# Altium PCB v3.1.PcbDoc
Units mm, origin at the board's own origin, x right, y up, seen from the top; angles counter-clockwise.
Board outline 166.23 x 128 mm, 2 copper layers (Top Layer, Bottom Layer); 84 components, 185 nets, 334 pads, 82 vias.
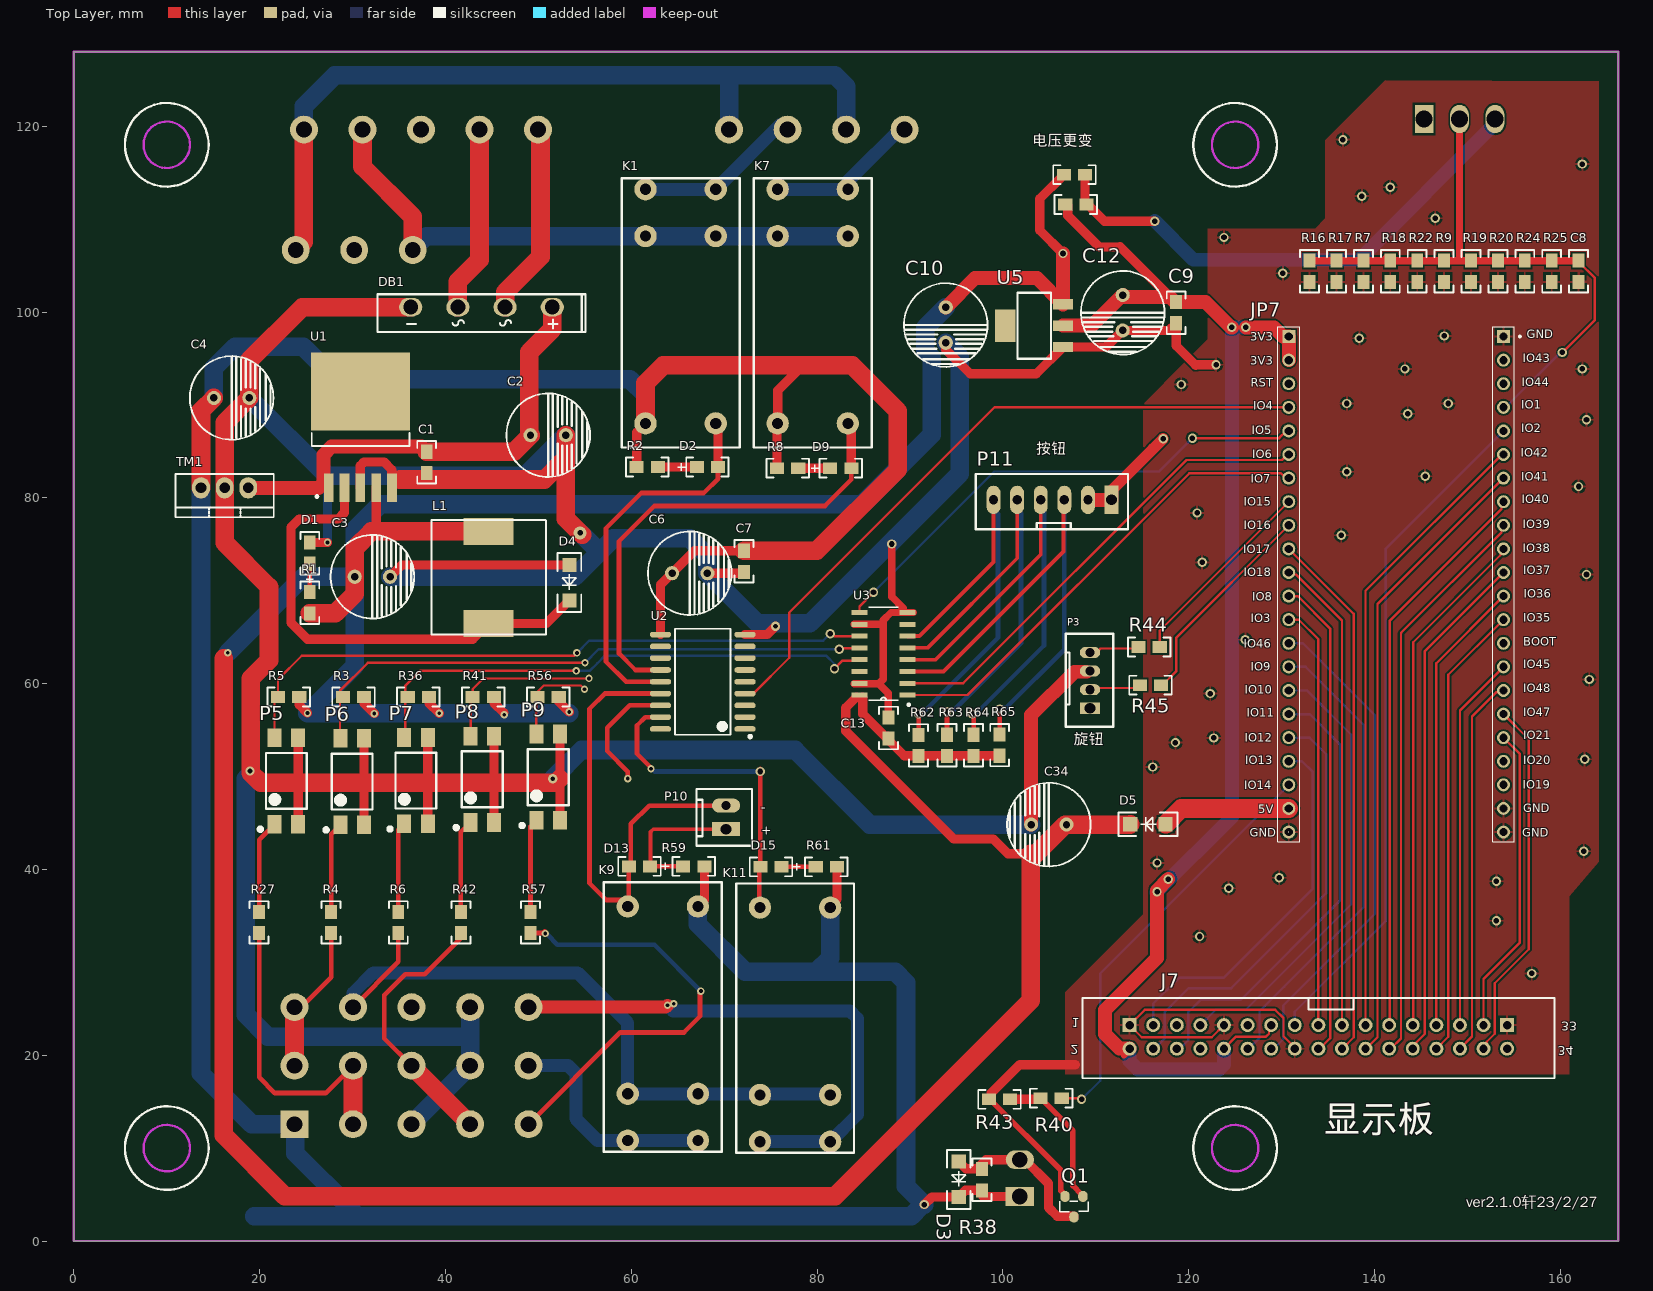
[diagram p0: Top Layer view]
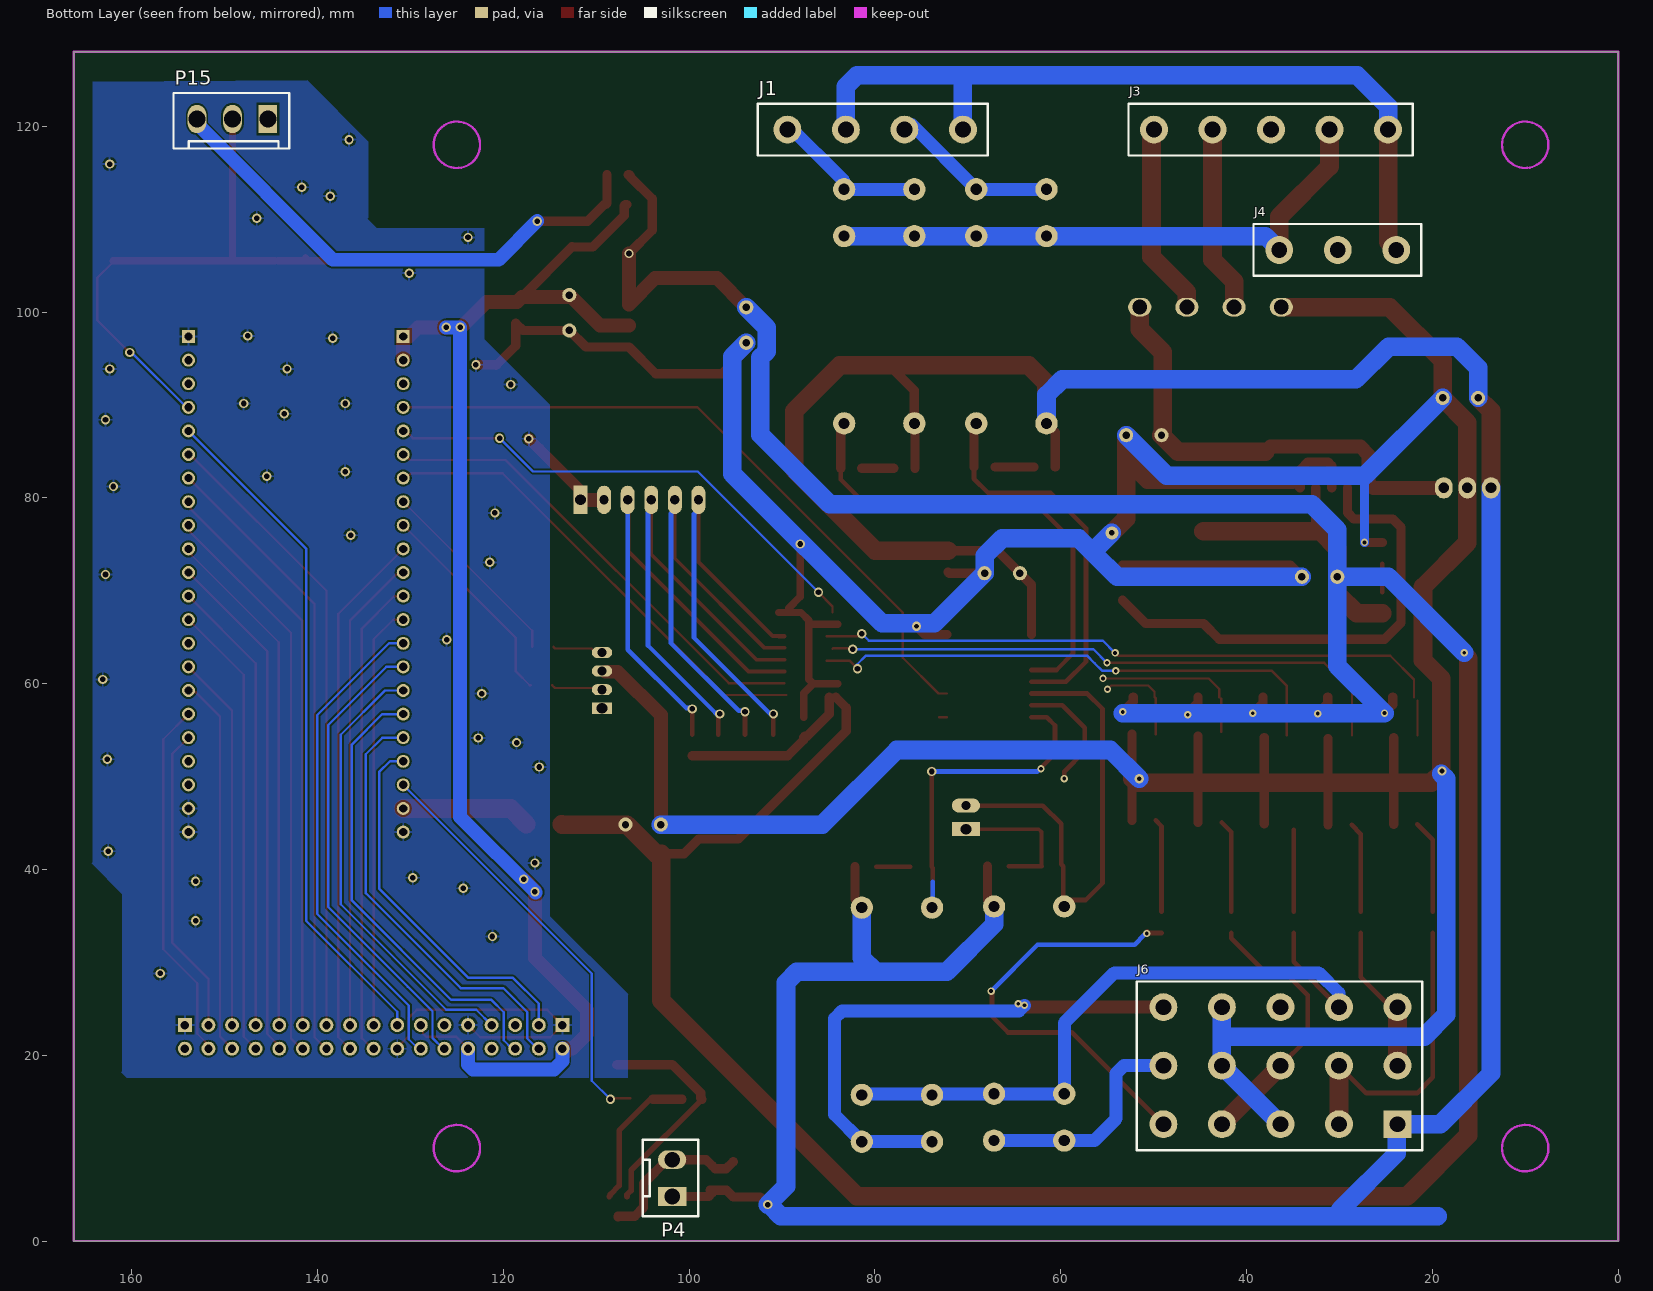
[diagram p1: Bottom Layer view, seen from below]

## Layer stack, top to bottom
Top Solder: solder mask 0.0102, Solder Resist, Dk 3.5
Top Layer: signal copper 0.0356
Dielectric1: dielectric 0.32, FR-4, Dk 4.8
Bottom Layer: signal copper 0.0356
Bottom Solder: solder mask 0.0102, Solder Resist, Dk 3.5

## Board outline
0,0 0,128 166.225,128 166.225,0

## Design rules (kind name [scope] priority, off if disabled: settings)
Clearance [All] p1: gap=0.2 ignorepadtopadclearanceinfootprint=FALSE except(0: Arc-Hole Track-Hole SMDPad-Hole THPad-Hole Via-Hole Fill-Hole Poly-Hole Region-Hole Text-Hole)
ComponentClearance [All] p1 off: gap=0.254 collisioncheckmode=3 verticalgap=0.254 showdistances=FALSE
PlaneConnect [All] p1: planeconnectstyle=Direct reliefexpansion=0.508 reliefentries=4 reliefconductorwidth=0.254 reliefairgap=0.254
PolygonConnect [All] p1: connectstyle=Relief reliefconductorwidth=0.254 reliefentries=4 polygonreliefangle="90 Angle" airgapwidth=0.254
RoutingVias [All] p1: holewidth=0.711 width=1.27 viastyle="Through Hole" minholewidth=0.711 minwidth=1.27 maxholewidth=0.711 maxwidth=1.27
SilkToSolderMaskClearance SilkscreenOverComponentPads [IsPad] p1: minsilkscreentomaskgap=0.254 clearancetoexposedcopper=TRUE
SolderMaskExpansion [All] p1: expansion=0.102 istentingtop=FALSE
Width [All] p1: maxlimit=5 minlimit=0.254 preferedwidth=0.3 minimp=50.000000 maximp=50.000000 favimp=50.000000
27 further rules are at their usual default settings.

## Classes and differential pairs
component class Drive: C1 C2 C3 C4 C6 C7 C8 C9 C10 C12 C34 D1 D2 D3 D4 D9 D13 D15 DB1 J1 J3 J4 J6 K1 K7 K9 K11 L1 P4 P5 P6 P7 P8 P9 P15 Q1 R1 R2 R3 R4 R5 R6 R7 R8 R9 R16 R17 R18 R19 R20 R22 R24 R25 R27 R36 R38 R40 R41 R42 R43 R56 R57 R59 R61 TM1 U1 U2 U5

## Components (designator, comment, footprint, x,y, rotation, side; value= is the part's Value field where it differs from the comment)
C1 "104" 0805 37.973,82.677 r90 top
C2 "470UF/50V" CD9 50.8,86.741 r90 top value=470uF
C3 "220uF/50V" CD9 31.877,71.501 r90 top value=470uF
C4 "470UF/50V" CD9 16.725,90.75 r90 top value=470uF
C6 "220uF/50V" CD9 66.04,71.882 r90 top value=470uF
C7 "104" 0805 72.136,72.009 r90 top
C8 "103" 0805 161.971,103.244 r90 top
C9 "104" 0805 118.65,101.075 r270 top
C10 "470UF/50V" CD9 93.85,98.85 r0 top
C12 "470UF/50V" CD9 112.9,100.175 r0 top locked
C13 "104" 0805 87.675,56.361 r270 top (schematic designator C9)
C34 "470UF/50V" CD9 105.199,44.825 r270 top value=470uF
D1 "04" LED-T 25.527,74.041 r90 top
D2 "04" LED-T 68.199,83.185 r0 top
D3 "IN4148" DO-214AC 94.875,5.625 r180 top
D4 "IN5819" DO-214AC 52.959,69.85 r180 top
D5 "IN5819" DO-214AC 114.598,45.25 r90 top (schematic designator D4)
D9 "04" LED-T 82.55,83.058 r0 top
D13 "04" LED-T 60.885,40.455 r180 top
D15 "04" LED-T 75.037,40.405 r180 top
DB1 "DB157S" LC-GBU 43.875,100.525 r0 top
J1 "CON4" 4PIN-6.3 70.525,119.634 r0 bottom
J3 "变压器入" 5PIN-6.3 24.765,119.634 r0 bottom
J4 "220V供电" 3PIN-6.3 23.876,106.68 r0 bottom
J6 "3*15JR" 3*5PIN-6.3 23.749,12.573 r0 bottom
J7 "header34" "PCBComponent_1 - duplicate" 161.29,134.65 r180 top locked
JP7 "Comment" TE_5-22 111.135,82.44 r0 top locked
K1 "HF115F/024-1HS3" HF115FA 69.088,88.011 r90 top
K7 "HF115F/024-1HS3" HF115FA 83.312,88.011 r90 top
K9 "HF115F/024-1HS3" HF115FA 59.615,36.01 r270 top locked
K11 "HF115F/024-1HS3" HF115FA 73.85,35.885 r270 top
L1 "330uH" SMD331 38.481,65.278 r0 top
P3 "Header4" "4PIN 2.0" 104.025,55.35 r90 top
P4 "Header 2" "2PIN 3.96" 101.825,8.75 r90 bottom
P5 "PC817" LC-SMD-4 22.875,49.525 r90 top
P6 "PC817" LC-SMD-4 29.95,49.45 r90 top
P7 "PC817" LC-SMD-4 36.825,49.55 r90 top
P8 "PC817" LC-SMD-4 43.95,49.7 r90 top
P9 "PC817" LC-SMD-4 51.05,49.925 r90 top
P10 "Header 2" "2PIN 2.54" 70.2,45.6 r90 top (schematic designator P2)
P11 "Header 6" PCBComponent_1 152.335,79.175 r180 top
P15 "Header 3" "3PIN 3.96" 149.155,120.775 r0 bottom
Q1 "8050" "SOT-23 - duplicate" 107.7,3.625 r180 top
R1 "2K" 0805 25.4,69.85 r270 top
R2 "10k" 0805 62.865,83.312 r180 top value=10K
R3 "10k" 0805 28.956,58.547 r0 top value=10K
R4 "4.7K" 0805 27.686,33.147 r90 top
R5 "10k" 0805 21.971,58.547 r0 top value=10K
R6 "4.7K" 0805 34.925,33.147 r90 top
R7 "47K" 0805 138.806,103.244 r90 top
R8 "10k" 0805 77.978,83.185 r180 top value=10K
R9 "47K" 0805 147.493,103.244 r90 top
R16 "47K" 0805 133.015,103.244 r90 top
R17 "47K" 0805 135.911,103.244 r90 top
R18 "47K" 0805 141.702,103.244 r90 top
R19 "47K" 0805 150.389,103.244 r90 top
R20 "47K" 0805 153.284,103.244 r90 top
R22 "47K" 0805 144.597,103.244 r90 top
R24 "47K" 0805 156.18,103.244 r90 top
R25 "47K" 0805 159.075,103.244 r90 top
R27 "4.7K" 0805 19.939,33.147 r90 top
R36 "10k" 0805 35.941,58.547 r0 top value=10K
R38 "10K" 0805 97.75,7.736 r270 top value="RT0603BRD071KL YAGEO"
R40 "470" 0805 106.336,15.375 r180 top value="RT0603BRD071KL YAGEO"
R41 "10k" 0805 42.926,58.547 r0 top value=10K
R42 "4.7K" 0805 41.656,33.147 r90 top
R43 "10K" 0805 98.489,15.25 r0 top value="RT0603BRD071KL YAGEO"
R44 "10K" 0805 116.886,63.95 r180 top value="RT0603BRD071KL YAGEO" (schematic designator R43)
R45 "10K" 0805 117.036,59.825 r180 top value="RT0603BRD071KL YAGEO" (schematic designator R43)
R56 "10k" 0805 49.911,58.547 r0 top value=10K
R57 "4.7K" 0805 49.149,33.147 r90 top
R59 "10k" 0805 65.584,40.328 r0 top value=10K
R60 "0k" 0805 109,111.575 r180 top value=10K
R60 "0k" 0805 108.85,114.775 r180 top value=10K
R61 "10k" 0805 79.863,40.278 r0 top value=10K
R62 "10k" 0805 90.925,52.2 r90 top value=10K (schematic designator R60)
R63 "10k" 0805 93.988,52.214 r90 top value=10K (schematic designator R60)
R64 "10k" 0805 96.85,52.214 r90 top value=10K (schematic designator R60)
R65 "10k" 0805 99.65,52.242 r90 top value=10K (schematic designator R60)
TM1 "LM7824CT" TO-220 16.225,81.075 r180 top
U1 "LM2575-5" D2PAK 37.211,89.535 r90 top
U2 "ULN2803" SOP-18_300mil 67.691,60.198 r90 top
U3 "SN74HC165D" 74HC165 87.15,62.575 r180 top
U5 "AMS1117-3.3_C166063" SOT-223_L6.7-W3.5-P2.30-BR 103.375,98.525 r0 top

## Footprints (in the part's own frame and the unit in brackets; to place one, negate y for a bottom-side part, rotate by r counter-clockwise, add the part's x,y. Pads: shape width x height; smd on the part's side, far side on the other; paste and mask are expansions set on the pad)
"2PIN 2.54" [mm]
  rect 1.5x3.048 hole 1.143: 1(-1.27,0)
  oval 1.5x3.048 hole 1: 2(1.27,0)
  silkscreen extent -3.05,-2.79 3.05,3.18
"2PIN 3.96" [mm]
  rect 2x3.048 hole 1.7: 1(-3.96,0)
  oval 2x3.048 hole 1.7: 2(0,0)
  silkscreen extent -6.1,-2.79 2.16,3.18
3*5PIN-6.3 [mm]
  rect 3x3 hole 1.7: 1(0,0)
  round 3 hole 1.7: 2(6.3,0) 3(12.6,0) 4(18.9,0) 5(25.2,0) 6(0,-6.3) 7(6.3,-6.3) 8(12.6,-6.3) 9(18.9,-6.3) 10(25.2,-6.3) 11(0,-12.6) 12(6.3,-12.6) 13(12.6,-12.6) 14(18.9,-12.6) 15(25.2,-12.6)
  silkscreen extent -2.67,-15.37 28.07,2.79
"3PIN 3.96" [mm]
  rect 2x3.048 hole 1.8: 1(-3.82,0)
  oval 2x3.048 hole 1.8: 2(0,0) 3(3.82,0)
  silkscreen extent -6.1,-2.79 6.35,3.17
3PIN-6.3 [mm]
  round 3 hole 1.7: 1(0,0) 2(6.3,0) 3(12.6,0)
  silkscreen extent -2.67,-2.79 15.37,2.79
"4PIN 2.0" [mm]
  rect 1.2x2.2 hole 1.143: 1(2,-5.35)
  oval 1.2x2.2 hole 1: 2(4,-5.35) 3(6,-5.35) 4(8,-5.35)
  silkscreen extent 0,-7.85 10,-2.75
4PIN-6.3 [mm]
  round 3 hole 1.7: 1(0,0) 2(6.3,0) 3(12.6,0) 4(18.9,0)
  silkscreen extent -2.67,-2.79 22.1,2.79
5PIN-6.3 [mm]
  round 3 hole 1.7: 1(0,0) 2(6.3,0) 3(12.6,0) 4(18.9,0) 5(25.2,0)
  silkscreen extent -2.67,-2.79 27.94,2.79
74HC165 [mil]
  rect 67x21 smd: CLK(-102,100) CLKINH(102,100) D0(102,-100) D1(102,-50) D2(102,0) D3(102,50) D4(-102,50) D5(-102,0) D6(-102,-50) D7(-102,-100) GND(-102.05,-199.95) LD(-102,150) QH(101.95,-199.95) "QH\""(-102,-150) SER(102,-150) VCC(102,150)
  silkscreen extent -111,-222 63,195
0805 [mil]
  rect 60x50 smd: 1(0,0) 2(90,0)
  silkscreen extent -45,-40 135,40
CD9 [mil]
  round 60 hole 31.5: 1(0,65) 2(0,-85)
  silkscreen extent -177,-187 177,167, body extent -181,-191 181,171, height 50
D2PAK [mm] "LM-2575"
  rect 3.05x1.05 smd: 1(-8.451,9.779) 2(-8.451,8.077) 3(-8.451,6.375) 4(-8.451,4.673) 5(-8.451,2.971)
  rect 8.4x10.65 smd: ""(1.899,6.35)
  silkscreen extent -9.52,1.1 -2.57,11.6, body extent -8.7,1.47 5.7,11.47, height 4.21
DO-214AC [mil]
  rect 60x60 smd: 1(-15,-115) 2(-15,35)
  silkscreen extent -65,-165 35,85
HF115FA [mm]
  round 2.4 hole 1.2: 1(20.16,7.56) 2(25.2,7.56) 3(20.16,0) 4(25.2,0) 5(0,7.56) 6(0,0)
  silkscreen extent -2.6,-2.57 26.4,10.13
LC-GBU [mm]
  oval 2.5x2 hole 1.6: 1(-2.54,0) 2(2.54,0) 3(7.62,0) 4(-7.62,0)
  silkscreen extent -11.2,-2.67 11.2,1.4
LC-SMD-4 [mm]
  rect 2x1.5 smd: 1(-4.65,1.27) 2(-4.65,-1.27) 3(4.65,-1.27) 4(4.65,1.27)
  silkscreen extent -5.4,-2.2 3,3, body extent -5.02,-2.42 5.01,2.42, height 3.9
LED-T [mil]
  rect 60x50 smd: 1(-45,5) 2(45,5)
  silkscreen extent -125,-35 90,45, body extent -34,-20 44,30, height 28
PCBComponent_1 [mm]
  rect 1.5x3.048 hole 1.143: 1(40.64,-0.6)
  oval 1.5x3.048 hole 1: 2(43.18,-0.6) 3(45.72,-0.6) 4(48.26,-0.6) 5(50.8,-0.6) 6(53.34,-0.6)
  silkscreen extent 38.86,-3.39 55.24,2.57
"PCBComponent_1 - duplicate" [mm]
  round 1.5 hole 0.9: 3V3(37.49,113.95) 3V3(47.65,113.95) CS(29.87,113.95) D0(9.55,113.95) D1(9.55,111.41) D2(12.09,113.95) D3(12.09,111.41) D4(14.63,113.95) D5(14.63,111.41) D6(17.17,113.95) D7(17.17,111.41) D8(19.71,113.95) D9(19.71,111.41) D10(22.25,113.95) D11(22.25,111.41) D12(24.79,113.95) D13(24.79,111.41) D14(27.33,113.95) D15(27.33,111.41) INT(40.03,111.41) NC(7.01,113.95) NC(34.95,111.41) NC(40.03,113.95) PS(37.49,111.41) RD(32.41,111.41) RS(29.87,111.41) RST(34.95,113.95) SCL(45.11,111.41) SDA(45.11,113.95) T_IN(42.57,111.41) WAT(42.57,113.95) WR(32.41,113.95)
  rect 1.5x1.5 hole 0.9: GND(7.01,111.41) GND(47.65,111.41)
  silkscreen extent 1.93,108.49 52.73,117.13
SMD331 [mm]
  rect 5.4x2.9 smd: 1(6.15,1.2) 2(6.15,11.1)
  silkscreen extent 0,0 12.32,12.32
SOP-18_300mil [mm]
  oval 0.6x2.3 smd: 1(-5.08,-4.55) 2(-3.81,-4.55) 3(-2.54,-4.55) 4(-1.27,-4.55) 5(0,-4.55) 6(1.27,-4.55) 7(2.54,-4.55) 8(3.81,-4.55) 9(5.08,-4.55) 10(5.08,4.55) 11(3.81,4.55) 12(2.54,4.55) 13(1.27,4.55) 14(0,4.55) 15(-1.27,4.55) 16(-2.54,4.55) 17(-3.81,4.55) 18(-5.08,4.55)
  silkscreen extent -6.05,-5.25 5.7,3
"SOT-23 - duplicate" [mil]
  oval 40x47.24 smd: B(-35.98,-45.98) C(2.01,40.98) E(40,-45.98)
  silkscreen extent -59,-26 62,18
SOT-223_L6.7-W3.5-P2.30-BR [mm]
  rect 2.2x1.1 smd: 1(3.099,-2.3) 2(3.099,0) 3(3.099,2.3)
  rect 2.2x3.5 smd: 4(-3.099,0)
  silkscreen extent -1.8,-3.55 1.8,3.55
TE_5-22 [mm]
  rect 1.398x1.398 hole 0.89: 1(19.64,14.92) 1(42.75,14.92)
  round 1.398 hole 0.89: 2(19.64,12.38) 2(42.75,12.38) 3(19.64,9.84) 3(42.75,9.84) 4(19.64,7.3) 4(42.75,7.3) 5(19.64,4.76) 5(42.75,4.76) 6(19.64,2.22) 6(42.75,2.22) 7(19.64,-0.32) 7(42.75,-0.32) 8(19.64,-2.86) 8(42.75,-2.86) 9(19.64,-5.4) 9(42.75,-5.4) 10(19.64,-7.94) 10(42.75,-7.94) 11(19.64,-10.48) 11(42.75,-10.48) 12(19.64,-13.02) 12(42.75,-13.02) 13(19.64,-15.56) 13(42.75,-15.56) 14(19.64,-18.1) 14(42.75,-18.1) 15(19.64,-20.64) 15(42.75,-20.64) 16(19.64,-23.18) 16(42.75,-23.18) 17(19.64,-25.72) 17(42.75,-25.72) 18(19.64,-28.26) 18(42.75,-28.26) 19(19.64,-30.8) 19(42.75,-30.8) 20(19.64,-33.34) 20(42.75,-33.34) 21(19.64,-35.88) 21(42.75,-35.88) 22(19.64,-38.42) 22(42.75,-38.42)
  silkscreen extent 18.47,-39.49 44.62,15.99
TO-220 [mil]
  oval 75x90 hole 45: 1(-100,0) 2(0,0) 3(100,0)
  silkscreen extent -208,-58 208,125

## Part data
C1 C7 C8: library part Cap, "Capacitor", LatestRevisionDate=17-Jul-2002, LatestRevisionNote="Re-released for DXP Platform.", PackageReference=RAD-0.3, Published=8-Jun-2000, Publisher="Altium Limited"
C2 C3 C4 C6 C34: library part "Cap Pol1", "Polarized Capacitor (Radial)", LatestRevisionDate=17-Jul-2002, LatestRevisionNote="Re-released for DXP Platform.", PackageReference=RB7.6-15, Published=8-Jun-2000, Publisher="Altium Limited"
C9 C13: library part CAP
C10 C12: library part ECAP
D1 D2 D9 D13 D15: library part LED0, "Typical INFRARED GaAs LED", LatestRevisionDate=08-Jul-2005, LatestRevisionNote="Mech Layer 1 removed.", PackageDescription="LED; 2 Leads", PackageReference=LED-0, Published=8-Jun-2000, Publisher="Altium Limited"
D3 D4 D5: library part "D Zener", "Zener Diode", LatestRevisionDate=17-Jul-2002, LatestRevisionNote="Re-released for DXP Platform.", PackageReference=DIODE-0.7, Published=8-Jun-2000, Publisher="Altium Limited"
DB1: library part BRIDGE2
J1: "Connector"
J3: library part CON5, "Connector"
J4: library part CON3, "Connector"
J6: library part Component_1
J7: "Header, 34-Pin2.54MM"
K1 K7 K9 K11: library part RELAY-DPST
L1: library part Inductor, "Inductor", Code_IEC=1005, Code_JEITA=0402, LatestRevisionDate=29-May-2009, LatestRevisionNote="IPC-7351 Footprint Added.", PackageDescription="Chip Inductor", PackageReference=0402-A, Published=8-Jun-2000, Publisher="Altium Limited"
P3: "Header, 4-Pin2MM"
P4 P10: "Header, 2-Pin", LatestRevisionDate=17-Jul-2002, LatestRevisionNote="Re-released for DXP Platform.", Publisher="Altium Limited"
P5 P6 P7 P8 P9: library part P521
P15: "Header, 3-Pin", LatestRevisionDate=17-Jul-2002, LatestRevisionNote="Re-released for DXP Platform.", Publisher="Altium Limited"
Q1: library part BC817-8050
R1 R2 R3 R4 R5 R6 R7 R8 R9 R16 R17 R18 R19 R20 R22 R24 R25 R27 R36 R38 R40 R41 R42 R43 R44 R45 R56 R57 R59 R60 R60 R61 R62 R63 R64 R65: library part Res2, "Resistor", LatestRevisionDate=17-Jul-2002, LatestRevisionNote="Re-released for DXP Platform.", PackageReference=AXIAL-0.4, Published=8-Jun-2000, Publisher="Altium Limited"
U1: library part LM2575
U5: library part AMS1117-1.5_C166063, BOM_LCSC Assembly=Yes, BOM_Manufacturer=SK, BOM_Manufacturer Part=AMS1117-1.5, BOM_Supplier=LCSC, BOM_Supplier Part=C166063, Contributor=LCSC, SMT Type=Extend, spicePre=U

## Via types
v1: diameter 1, hole 0.6, Top Layer to Bottom Layer, 60 vias
v2: diameter 0.8, hole 0.4, Top Layer to Bottom Layer, tented both sides, 18 vias
v3: diameter 1, hole 0.5, Top Layer to Bottom Layer, tented both sides, 3 vias
v4: diameter 1.4, hole 0.6, Top Layer to Bottom Layer, tented both sides, 1 vias

## Nets (pads, with @x,y where several pads share a name; then routed paths per layer and width w, separated by ;. In a path a pad name is that pad's centre, name@x,y a point inside that pad or via, vN(x,y) a via of type N, cw(c..) or ccw(c..) an arc to the next point about the centre after c; other vN are vias at no path point)
165_CLK: JP7.6@130.775,84.66 U3.CLK | length 51.2
  Top Layer w0.254: U3.CLK@89.741,60.04 95.719,60.04 119.754,84.075 130.054,84.075 130.639,84.66 JP7.6@130.775,84.66
165_LD: JP7.7@130.775,82.12 U3.LD | length 51.4
  Top Layer w0.254: U3.LD@89.525,58.77 96.195,58.77 120.075,82.65 129.935,82.65 130.465,82.12 JP7.7@130.775,82.12
165_QH: JP7.5@130.775,87.2 U3.QH | length 54.7
  Top Layer w0.254: U3.QH 84.561,68.311 v1(86.075,69.825) ; v1(120.4,86.425) 129.737,86.425 130.512,87.2 JP7.5@130.775,87.2
  Bottom Layer w0.254: v1(86.075,69.825) 99.075,82.825 116.8,82.825 v1(120.4,86.425)
485-EN: 
485-RXD: 
485-TXD: 
+3.3V: C9.1 C12.1 J7.3V3 J7.RD JP7.1@130.775,97.36 JP7.2@130.775,94.82 R60.2@106.714,111.575 U5.2 | length 154.2
  Top Layer w0.254: J7.3V3@113.64,20.543 J7.3V3@113.64,20.7 ; J7.3V3@123.8,20.7 125.1,22 128.325,22 128.642,22.317 128.642,23.002 J7.RD
  Top Layer w0.6: 113.025,19.928 J7.3V3@113.64,20.543
  Top Layer w1: R60.2@106.714,111.575 106.841,111.575 106.976,111.44 106.976,110.399 110.375,107 112.6,107 ; 112.6,107.022 117.997,101.625
  Top Layer w1.5: U5.2 109.599,98.525 C12.1 112.906,101.826 113.107,101.625 117.997,101.625 118.547,101.075 C9.1 121.825,101.075 124.55,98.35 v1(124.65,98.35) ; J7.3V3@113.64,20.7 112.575,20.7 110.975,22.3 110.975,24.85 116.6,30.475 v1(116.6,37.6) 116.6,37.75 v1(117.8,38.95) ; v1(126.15,98.35) 129.166,98.35 130.156,97.36 130.775,97.36 JP7.2@130.775,94.82
  Bottom Layer w1.5: J7.3V3@113.64,20.7 113.64,19.354 114.519,18.475 123.275,18.475 123.8,19 ; v1@116.525,37.525 v1(116.6,37.6) 124.65,45.65 v1(124.65,98.35) v1(126.15,98.35) ; 123.8,19.25 J7.3V3@123.8,20.7
AC24L: DB1.1 J3.4 | length 20.1
  Top Layer w2: DB1.1 41.335,103.285 43.665,105.615 J3.4
AC24N: DB1.2 J3.5 | length 20.8
  Top Layer w2: DB1.2 46.415,102.14 50.225,105.95 50.225,119.374 J3.5
AC230_L: J1.1 J1.3 J3.1 J4.1 | length 85.6
  Top Layer w2: J4.1 24.765,107.569 J3.1
  Bottom Layer w2: J3.1 24.765,122.14 28.1,125.475 70.275,125.475 ; J1.1@70.525,120.175 70.525,125.225 70.275,125.475 ; J1.3@83.125,120.175 83.125,124.275 81.925,125.475 70.275,125.475
AC230_N: J3.2 J4.3 K1.1 K1.3 K7.1 K7.3 | length 62.6
  Top Layer w2: J3.2 31.065,115.66 36.476,110.249 J4.3
  Bottom Layer w2: J4.3 37.967,108.171 K1.1 K1.3 K7.1 K7.3
ACOUTA: J1.2 K1.2 K1.4 | length 18.2
  Bottom Layer w1.4: K1.2 K1.4 76.052,120.175 J1.2@76.825,120.175
ACOUTB: J1.4 K7.2 K7.4 | length 17.1
  Bottom Layer w1.4: K7.2 K7.4 83.312,114.062 J1.4@89.425,120.175
ADC_NTC: 
ADC_ON: 
AREF: 
ASW_1: D2.2 K1.6 U2.14 | length 41.5
  Top Layer w0.5: U2.14 59.436,60.198 57.277,62.357 57.277,76.708 61.087,80.518 67.818,80.518 69.342,82.042 D2.2
  Top Layer w1: K1.6 69.342,87.757 D2.2
ASW_2: D9.2 K7.6 U2.13 | length 51.2
  Top Layer w0.5: U2.13 60.452,61.468 58.674,63.246 58.674,75.311 62.484,79.121 80.846,79.121 83.693,81.968 D9.2
  Top Layer w1: K7.6 83.693,87.63 D9.2
AVCC: D5.1 JP7.21@130.775,46.56 | length 14
  Top Layer w2: D5.1 119.21,46.56 JP7.21@130.775,46.56
BU1: P11.6 R62.2 U3.D7 | length 48.5
  Top Layer w0.4: U3.D7@90.325,65.115 91.01,65.115 98.995,73.1 P11.6
  Top Layer w0.5: U3.D7 U3.D7@90.325,65.115 ; R62.2 v1(90.925,56.739)
  Bottom Layer w0.5: v1(90.925,56.739) 91.021,56.835 91.365,56.835 99.475,64.945 99.475,78.25 98.995,78.73 P11.6
BU2: P11.5 R63.2 U3.D6 | length 50.9
  Top Layer w0.4: U3.D6 91.895,63.845 101.535,73.485 P11.5
  Top Layer w0.5: R63.2 v1@93.988,56.739
  Bottom Layer w0.5: v1(93.988,56.975) 94.076,57.063 94.668,57.063 101.95,64.345 101.95,78.315 101.535,78.73 P11.5
BU3: P11.4 R64.2 U3.D5 | length 53.8
  Top Layer w0.4: U3.D5 92.75,62.575 104.075,73.9 P11.4
  Top Layer w0.5: v1(96.699,56.739) 96.85,56.588 R64.2
  Bottom Layer w0.5: v1(96.699,56.739) 96.795,56.835 97.16,56.835 104.425,64.1 104.425,78.38 104.075,78.73 P11.4
BU4: P11.3 R65.2 U3.D4 | length 55.9
  Top Layer w0.4: U3.D4 93.605,61.305 106.521,74.221 P11.3@106.521,79.681
  Top Layer w0.5: R65.2 v1@99.65,56.975 ; P11.3@106.521,79.681 P11.3
  Bottom Layer w0.5: v1(99.65,57.275) 99.746,57.371 100.321,57.371 106.615,63.665 P11.3
BZ1: JP7.20@130.775,49.1 R40.1 | length 45.4
  Top Layer w0.254: R40.1 108.343,15.375 v1(108.468,15.25) v1@108.533,15.185
  Bottom Layer w0.254: v1(108.468,15.25) 110.475,17.257 110.475,28.8 JP7.20@130.775,49.1
D0: J7.D0 JP7.17@153.885,56.72 | length 39.2
  Top Layer w0.254: J7.D0 151.74,21.037 152.091,21.388 152.091,21.441 152.95,22.3 152.95,27.75 156.6,31.4 156.6,54.005 JP7.17@153.885,56.72
D1: J7.D1 JP7.18@153.885,54.18 | length 33.3
  Top Layer w0.254: J7.D1 151.74,28.215 155.65,32.125 155.65,52.415 JP7.18@153.885,54.18
D2: J7.D2 JP7.16@153.885,59.26 | length 40.9
  Top Layer w0.254: J7.D2 150.5,22 150.5,56.475 153.075,59.05 153.675,59.05 JP7.16@153.885,59.26
D3: J7.D3 JP7.15@153.885,61.8 | length 40.5
  Top Layer w0.254: J7.D3 149.2,57.115 JP7.15@153.885,61.8
D4: J7.D4 JP7.13@153.885,66.88 | length 49.2
  Top Layer w0.254: J7.D4 147.95,21.99 147.95,60.945 JP7.13@153.885,66.88
D5: J7.D5 JP7.12@153.885,69.42 | length 49.2
  Top Layer w0.254: J7.D5 146.66,62.195 JP7.12@153.885,69.42
D6: J7.D6 JP7.11@153.885,71.96 | length 55.3
  Top Layer w0.254: J7.D6 144.12,20.995 145.425,22.3 145.425,63.5 JP7.11@153.885,71.96
D7: J7.D7 JP7.10@153.885,74.5 | length 55.3
  Top Layer w0.254: J7.D7 144.175,23.295 144.175,64.45 153.545,73.82 153.545,73.851 153.885,74.19 JP7.10@153.885,74.5
D8: J7.D8 JP7.9@153.885,77.04 | length 61.5
  Top Layer w0.254: J7.D8 141.75,20.7 142.85,21.8 142.85,65.45 142.887,65.487 153.666,76.266 153.666,76.821 JP7.9@153.885,77.04
D9: J7.D9 JP7.8@153.885,79.58 | length 61.4
  Top Layer w0.254: J7.D9 141.656,23.316 141.656,66.781 153.666,78.791 153.666,79.361 JP7.8@153.885,79.58
D10: J7.D10 JP7.7@153.885,82.12 | length 67.6
  Top Layer w0.254: J7.D10 139.1,20.7 140.325,21.925 140.325,68.56 JP7.7@153.885,82.12
D11: J7.D11 JP7.6@153.885,84.66 | length 67.7
  Top Layer w0.254: J7.D11 139.04,69.99 153.71,84.66 JP7.6@153.885,84.66
D12: J7.D12 JP7.10@130.775,74.5 | length 57.3
  Top Layer w0.254: JP7.10@130.775,74.5 137.775,67.5 137.775,21.925 136.55,20.7 J7.D12
D13: J7.D13 JP7.11@130.775,71.96 | length 51.4
  Top Layer w0.254: JP7.11@130.775,71.96 130.994,71.741 131.54,71.741 136.5,66.781 J7.D13
D14: J7.D14 JP7.12@130.775,69.42 | length 51.7
  Top Layer w0.254: JP7.12@130.775,69.42 131.73,69.42 135.225,65.925 135.225,21.825 134.1,20.7 J7.D14
D15: J7.D15 JP7.13@130.775,66.88 | length 45.6
  Top Layer w0.254: JP7.13@130.775,66.88 131.845,66.88 133.96,64.765 J7.D15
DATA_INA: 
DATA_INB: 
DATA_OUT: 
DC: J7.RS JP7.5@153.885,87.2 | length 73.3
  Bottom Layer w0.254: J7.RS 131.42,24.67 141.225,34.475 141.225,74.54 JP7.5@153.885,87.2
DC24V: C4.1 C6.1 C7.2 D3.2 J6.1 K1.5 K7.5 K9.5 K11.5 P4.1 R2.2 R8.2 R38.2 R59.2 R61.2 TM1.3 U2.10 | length 399.3
  Top Layer w1: R2.2 60.579,87.062 K1.5 ; U2.10 63.141,70.634 C6.1 66.802,74.295 C7.2 ; K9.5 67.87,36.705 R59.2 ; R8.2 75.692,87.951 K7.5 75.752,91.552 78.45,94.25 ; K11.5@81.327,35.96 82.149,36.782 R61.2 ; v1(91.55,3.925) 92.361,4.736 D3.2 95.97,5.45 R38.2 ; R38.2@97.495,5.195 97.899,4.79 P4.1
  Top Layer w2: TM1.3 13.685,89.361 C4.1 ; K1.5 61.528,92.328 63.45,94.25 78.45,94.25 83.775,94.25 88.7,89.325 88.7,83.05 79.945,74.295 C7.2
  Bottom Layer w2: TM1.3 13.685,18.04 19.152,12.573 J6.1 23.85,12.472 23.85,9.425 29.925,3.35 ; C4.1 15.074,93.999 17.35,96.275 24.7,96.275 28.225,92.75 59.85,92.75 61.528,91.072 K1.5 ; 19.425,2.675 90.128,2.675 v1@91.3,3.847 ; K9.5 67.175,34.075 72.275,28.975 79.925,28.975 ; K11.5 81.41,30.46 79.925,28.975 ; v1(91.55,3.925) 89.575,5.9 89.575,27.803 88.403,28.975 79.925,28.975
E+3.3V: 
EGND: P15.3 R60.1 | length 56.3
  Top Layer w1: R60.1@108.85,114.775 108.85,111.71 108.985,111.575 109,111.575 109.127,111.575 110.927,109.775 v1(116.35,109.775)
  Bottom Layer w1.5: v1(116.35,109.775) 120.503,105.622 138.346,105.622 152.885,120.161 152.885,120.685 P15.3
EP_CLK: 
EP_DIO: 
EP_STB: 
GND: C1.1 C2.2 C3.2 C4.2 C6.2 C7.1 C8.1 C9.2 C10.2 C12.2 C13.1 C34.2 D1.2 D4.1 DB1.4 J6.3 J6.9 J6.14 J7.CS J7.GND J7.PS JP7.1@153.885,97.36 JP7.21@153.885,46.56 JP7.22 P3.3 P5.2 P5.3 P6.2 P6.3 P7.2 P7.3 P8.2 P8.3 P9.2 P9.3 P11.1 P11.2 Q1.E R7.1 R9.1 R16.1 R17.1 R18.1 R19.1 R20.1 R22.1 R24.1 R25.1 R43.1 TM1.2 U1.3 U1.5 U2.9 U3.CLKINH U3.GND U3.SER U5.1 | length 632.1
  Top Layer w0.254: J7.PS 122.485,21.925 114.955,21.925 113.64,23.24 115.275,24.875 129.325,24.875 130.2,24 130.2,22.05 131.42,20.83 J7.CS
  Top Layer w0.6: R43.1 98.616,15.25 106.25,7.616 106.25,5.432 106.684,4.998 Q1.E
  Top Layer w0.8: U3.CLKINH@83.975,60 86.656,60 ; U3.SER@83.975,66.385 U3.SER 87.125,66.385 ; C13.1 87.675,58.981 86.656,60 ; v1(88.025,75.025) 88.025,69.371 89.291,68.105 89.291,67.787 U3.GND@89.425,67.654 ; U3.GND@90.35,67.654 U3.GND U3.GND@89.425,67.654 ; 86.656,60 87.125,60.469 87.125,66.385 ; 87.125,66.385 87.125,66.825 87.954,67.654 U3.GND@89.425,67.654
  Top Layer w1: P5.2 24.145,49.325 P5.3 ; D1.2 27.284,75.184 v2(27.3,75.2) ; U1.3 30.836,83.461 31.225,83.85 33.4,83.85 34.225,83.025 34.225,81.099 U1.5 35.128,81.972 ; P6.2 31.22,49.325 P6.3 ; C3.2 35.306,72.771 D4.1 ; P7.2 38.095,49.325 P7.3 ; P8.2 45.22,49.325 P8.3 ; P9.2 52.32,49.775 P9.3 ; C6.2 72.009,71.882 C7.1 ; U2.9 74.628,65.278 v3(75.525,66.175) ; C10.2 93.85,95.975 96.475,93.35 103.599,93.35 U5.1 111.109,96.225 C12.2 117.877,98.016 C9.2 118.65,96.378 120.703,94.325 ; R43.1@98.616,15.25 98.751,15.385 98.751,15.926 101.8,18.975 107.797,18.975 ; 120.771,94.257 120.703,94.325 ; v1(122.95,94.325) 120.703,94.325
  Top Layer w1.2: P11.1 111.845,79.925 111.845,80.945 116.175,85.275 v1(117.25,86.35)
  Top Layer w1.5: C34.2 103.04,56.617 107.698,61.275 P3.3@109.025,61.275 ; P11.2 P11.1
  Top Layer w2: 35.128,81.972 50.647,81.972 52.5,83.825 ; DB1.4 24.6,100.525 18.884,94.809 C4.2 16.225,88.091 TM1.2 16.225,75.175 21,70.4 21,62.5 19.05,60.55 19.05,50.375 20.1,49.325 24.145,49.325 31.22,49.325 38.095,49.325 45.22,49.325 51.87,49.325 52.32,49.775 ; C2.2 52.959,77.766 v4@54.7,76.025
  Bottom Layer w1: 27.259,82.375 27.3,82.334 v2(27.3,75.2)
  Bottom Layer w2: C4.2 27.259,82.375 48.593,82.375 C2.2 ; v3@19.025,50.275 18.5,49.75 18.5,24.375 20.875,22 42.649,22 ; C3.2 53.926,71.501 56.325,73.9 ; J6.3 J6.9 42.649,22 ; J6.14 42.649,22 ; v3(51.55,49.75) 54.65,52.85 77.63,52.85 85.655,44.825 C34.2 ; v4(54.5,76.225) 56.325,74.4 56.325,73.9 ; C10.2 95.35,95.191 95.35,82.6 79.225,66.475 73.606,66.475 C6.2 68.199,73.751 66.3,75.65 58.075,75.65 56.325,73.9
  other v1: 156.925,28.8 121.175,32.775 153.125,34.475 124.3,37.975 153.125,38.725 129.75,39.1 116.6,40.7 162.525,41.95 116.125,51.025 162.625,51.85 118.575,53.65 122.7,54.15 122.325,58.925 163.125,60.45 126.1,64.725 162.825,71.748 121.45,73.05 136.425,75.975 120.9,78.375 161.971,81.213 145.45,82.325 137.025,82.8 162.825,88.4 143.575,89.05 137.025,90.15 147.95,90.15 119.2,92.2 143.275,93.875 162.375,93.875 138.375,97.175 147.525,97.425 130.134,104.172 123.8,108.025 146.535,110.087 138.638,112.475 141.7,113.425 162.375,115.925 136.6,118.55
  other v3: 18.95,50.6
IN1A: 
IN1B: 
IN2A: 
IN2B: 
INT: J7.INT JP7.16@130.775,59.26 | length 48.6
  Bottom Layer w0.254: J7.INT 122.92,24.9 126.15,24.9 137.5,36.25 137.5,54.5 132.74,59.26 JP7.16@130.775,59.26
L_TER: C8.2 JP7.4@153.885,89.74 P15.2 R7.2 R9.2 R16.2 R17.2 R18.2 R19.2 R20.2 R22.2 R24.2 R25.2 | length 65.8
  Top Layer w0.254: JP7.4@153.575,89.74 JP7.4@153.885,89.74 ; 154.4,105.68 154.55,105.53 ; v1(160.225,95.65) 163.725,99.15 163.725,103.649 161.971,105.403 C8.2
  Top Layer w0.8: R16.2 R17.2 R7.2 140.991,105.53 ; R18.2@141.294,105.834 140.991,105.53 ; R22.2@144.235,105.53 R18.2 141.294,105.53 140.991,105.53 ; R22.2 R9.2 148.941,105.53 ; P15.2@149.15,120.883 149.15,105.739 148.941,105.53 ; C8.2 R25.2 R24.2 154.55,105.53 R20.2 R19.2 148.941,105.53
  Bottom Layer w0.254: JP7.4@153.885,89.74 154.113,89.74 160.023,95.65 v1(160.225,95.65)
LIN_B1: P5.4 R5.1 U3.D0 | length 71
  Top Layer w0.254: P5.4@21.59,54.434 R5.1@21.59,58.166 ; R5.1 21.971,60.427 24.536,62.992 53.842,62.992 v2(54.15,63.3) ; v1(81.407,65.375) 81.609,65.375 81.869,65.115 U3.D0 U3.D0@85.175,65.115
  Bottom Layer w0.254: v2(54.15,63.3) 55.475,64.625 80.657,64.625 v1(81.407,65.375)
LIN_B2: P6.4 R3.1 U3.D1 | length 62.6
  Top Layer w0.254: P6.4@28.639,54.434 28.639,59.245 31.623,62.23 v2(55.016,62.23) ; v1(82.4,63.7) 82.498,63.798 84.507,63.798 U3.D1@84.559,63.745
  Bottom Layer w0.254: v2(55.016,62.23) 56.486,63.7 v1(82.4,63.7)
LIN_B3: P7.4 R36.1 U3.D2 | length 57
  Top Layer w0.254: P7.4@35.687,54.434 35.687,59.792 37.262,61.366 v2(54.073,61.366) ; v1(81.875,61.6) 82.75,62.475 U3.D2@85.175,62.475
  Bottom Layer w0.254: v2(54.073,61.366) 55.516,61.366 56.35,62.2 57.161,63.011 80.976,63.011 v1@81.955,62.032
LIN_B4: P8.4 R41.1 | length 17.4
  Top Layer w0.254: P8.4@42.735,54.815 R41.1@42.735,58.356 ; R41.1 42.926,59.411 44.069,60.554 v2(55.448,60.554)
LIN_B5: P9.4 R56.1 | length 10.1
  Top Layer w0.254: P9.4@49.784,54.561 49.784,58.42 R56.1 49.911,59.131 50.571,59.792 54.559,59.792 v2(54.966,59.385)
LROUT5: 
LROUT6: 
LROUT7: 
LROUT8: 
LSW_A1: D13.2 K9.6 P10.2 U2.15 | length 53
  Top Layer w0.5: U2.15 57.15,58.928 55.499,57.277 55.499,38.526 57.322,36.703 K9.6@59.742,36.703 ; P10.2 61.925,46.87 59.955,44.9 59.955,40.541 D13.2 K9.6@59.742,36.703 ; K9.6@59.742,36.703 59.817,36.703 K9.6 59.742,36.137 K9.6@59.742,36.703
LSW_A2: U2.16 | length 13.1
  Top Layer w0.5: v2(59.615,49.775) 59.615,50.535 57.404,52.746 57.404,55.245 59.817,57.658 U2.16
LSW_A3: D15.2 K11.6 U2.17 | length 37.7
  Top Layer w0.5: v2(62.125,50.85) 62.125,50.928 60.613,52.44 60.613,55.488 61.513,56.388 U2.17 ; K11.6@73.767,35.96 73.767,40.151 D15.2 v1(73.894,50.535) v1@73.894,50.85
  Bottom Layer w0.5: v2(62.125,50.85) 62.206,50.85 62.521,50.535 v1(73.894,50.535) ; K11.6@73.767,35.96 73.767,38.658
MD1_A: 
MD1_B: 
MD2_A: 
MD2_B: 
MD_DC12V: 
NetBT1_1: 
NetC1_2: C1.2 C2.1 DB1.3 TM1.1 U1.1 | length 50.2
  Top Layer w1: C2.1 C2.1@49.403,86.995
  Top Layer w1.5: TM1.1 26.325,81.075 26.85,81.6 26.85,84.625 27.725,85.5 37.436,85.5 C1.2
  Top Layer w2: C1.2 47.371,84.963 C2.1 49.025,86.865 49.025,95.675 51.495,98.145 DB1.3
NetC16_1: 
NetC17_1: 
NetD1_1: D1.1 R1.1 | length 3
  Top Layer w0.5: R1.1 D1.1
NetD2_1: D2.1 R2.1 | length 4.2
  Top Layer w1: R2.1 D2.1
NetD3_1: D3.1 P4.2 Q1.C R38.1 | length 17.2
  Top Layer w1: D3.1 96.027,7.775 97.2,7.775 97.519,8.094 98.175,8.75 P4.2 102.349,8.75 104.913,6.186 104.913,3.612 105.846,2.679 107.642,2.679 107.649,2.672 Q1.C
NetD4_2: D4.2 L1.1 U1.2 | length 51.8
  Top Layer w1: U1.2 29.134,78.41 28.448,77.724 24.257,77.724 23.368,76.835 23.368,66.548 25.146,64.77 42.923,64.77 L1.1 50.857,66.478 D4.2
NetD9_1: D9.1 R8.1 | length 3.4
  Top Layer w1: R8.1 D9.1
NetD11_1: 
NetD11_2: 
NetD12_1: 
NetD12_2: 
NetD13_1: D13.1 P10.1 R59.1 | length 15.5
  Top Layer w0.4: D13.1 62.06,40.328 62.06,44.026 62.364,44.33 P10.1
  Top Layer w0.5: D13.1@62.06,40.328 R59.1
NetD13_1_1: 
NetD14_1: 
NetD15_1: D15.1 R61.1 | length 3.7
  Top Layer w0.5: D15.1 R61.1
NetD16_1: 
NetD17_1: 
NetD18_1: 
NetIC1_6: 
NetIC1_7: 
NetJ6_2: J6.2 J6.7 R27.1 | length 33.9
  Top Layer w0.5: R27.1 19.939,17.611 21.625,15.925 27.101,15.925 J6.7
  Top Layer w2: J6.2 J6.7
NetJ6_4: J6.4 J6.8 R42.1 | length 29
  Top Layer w0.5: J6.8 33.425,21.797 33.425,26.475 35.675,28.725 37.775,28.725 41.656,32.606 R42.1
  Top Layer w2: J6.8 J6.4
NetJ6_5: J6.5 R57.1 | length 47
  Top Layer w0.5: J6.5 58.826,22.45 65.675,22.45 67.4,24.175 67.4,26.8 v2(67.5,26.9) ; R57.1 50.522,33.147 v2@50.7,33.325
  Bottom Layer w0.5: v2@50.781,33.15 50.981,32.95 50.989,32.95 52.039,31.9 62.5,31.9 v2(67.5,26.9)
  other v2: 50.75,33.1
NetJ6_6: J6.6 J6.11 R4.1 | length 16.3
  Top Layer w0.5: J6.11 24.473,25.173 27.686,28.386 R4.1
  Top Layer w2: J6.6 J6.11
NetJ6_10: J6.10 K9.2 K9.4 | length 24.4
  Bottom Layer w1.4: J6.10 53.205,18.873 54.025,18.053 54.025,13.175 56.39,10.81 K9.2
NetJ6_12: J6.12 K9.1 K9.3 K11.1 K11.3 R6.1 | length 73.9
  Top Layer w0.5: J6.12 34.925,30.049 R6.1
  Bottom Layer w1.4: J6.12 30.049,26.699 32.225,28.875 54.225,28.875 59.615,23.485 K9.3 K9.1 K11.1@81.7,15.85
NetJ6_13: J6.13
NetJ6_15: J6.15 K11.2 K11.4 | length 58.1
  Top Layer w1.4: J6.15 63.698,25.173 v2(63.9,25.375)
  Bottom Layer w1.4: v2(63.9,25.375) 64.5,24.775 83.53,24.775 84.35,23.955 84.35,13.625 K11.2 K11.4
  other v2: 64.575,25.55
NetJ7_2: 
NetJ7_4: 
NetJ7_5: 
NetJ7_6: 
NetJ7_10: 
NetJ7_12: 
NetJ7_13: 
NetJ7_15: 
NetJP1_7: 
NetJP4_2: 
NetJP4_3: 
NetM1_1: 
NetM1_3: 
NetM1_11: 
NetM1_12: 
NetM1_15: 
NetM1_16: 
NetP2_1: 
NetP3_1: 
NetP5_1: P5.1 R27.2 | length 10.1
  Top Layer w0.5: R27.2 19.939,43.209 P5.1
NetP6_1: P6.1 R4.2 | length 9.8
  Top Layer w0.5: R4.2 27.686,43.806 P6.1
NetP7_1: P7.1 R6.2 | length 8.8
  Top Layer w0.5: R6.2 P7.1@34.925,44.27
NetP8_1: P8.1 R42.2 | length 10
  Top Layer w0.5: R42.2 41.656,44.026 P8.1
NetP9_1: P9.1 R57.2 | length 10.1
  Top Layer w0.5: R57.2 49.149,44.644 P9.1
NetP10_1: 
NetP11_1: 
NetP12_1: 
NetP13_1: 
NetP14_1: 
NetP17_1: 
NetP17_3: 
NetP19_1: 
NetP19_2: 
NetQ1_B: Q1.B R40.2 R43.2 | length 15.6
  Top Layer w0.6: R40.2 107.542,11.883 107.542,5.957 108.478,5.021 108.478,4.929 Q1.B
  Top Layer w1: R43.2 R40.2@103.925,15.25
NetU20_2: 
NetU20_3: 
Q: 
R_CLK: 
R_DIO: 
R_STB: 
R_TER: 
RELAY9: JP7.4@130.775,89.74 U2.4 | length 74.2
  Top Layer w0.254: U2.4 73.153,58.928 77,62.775 77,67.65 99.09,89.74 JP7.4@130.775,89.74
RELAY10: 
RELAY11: U2.2 | length 0.9
  Top Layer w0.254: U2.2 U2.2@73.091,56.388
RESET: 
RIN_B1: 
RIN_B2: 
RIN_B3: 
RIN_B4: 
RIN_B5: 
ROTARY_A: P3.4 R44.2 | length 5.5
  Top Layer w0.254: P3.4 110.072,63.35 110.497,63.775 114.425,63.775 R44.2
ROTARY_A1: JP7.8@130.775,79.58 R44.1 | length 21.4
  Top Layer w0.254: R44.1 116.886,65.691 JP7.8@130.775,79.58
ROTARY_B: P3.2 R45.2 | length 5.6
  Top Layer w0.254: P3.2 109.55,59.525 114.45,59.525 R45.2
ROTARY_B1: JP7.9@130.775,77.04 R45.1 | length 23
  Top Layer w0.254: R45.1 117.163,59.825 118.65,61.312 118.65,64.915 JP7.9@130.775,77.04
RST: J7.RST JP7.15@130.775,61.8 | length 50.8
  Bottom Layer w0.254: J7.RST 126.475,20.7 127.625,21.85 127.625,24.725 130.275,27.375 138.85,35.95 138.85,55.55 132.6,61.8 JP7.15@130.775,61.8
RSW_A1: 
RSW_A2: 
RSW_A3: 
SCL: J7.SCL JP7.19@130.775,51.64 | length 40.2
  Bottom Layer w0.254: J7.SCL 116.18,25.555 118.95,28.325 123.75,28.325 133.365,37.94 133.365,50.468 132.193,51.64 JP7.19@130.775,51.64
SDA: J7.SDA JP7.18@130.775,54.18 | length 46.9
  Bottom Layer w0.254: J7.SDA 116.325,20.7 117.425,21.8 117.425,24.65 120,27.225 124.575,27.225 134.8,37.45 134.8,52.4 133.02,54.18 JP7.18@130.775,54.18
SPI_MISO: 
SPI_MOSI: 
SPI_SCK: 
VCC: C3.1 C10.1 C13.2 C34.1 D5.2 L1.2 R1.2 R3.2 R5.2 R36.2 R41.2 R56.2 R60.2@106.564,114.775 R62.1 R63.1 R64.1 R65.1 U1.4 U3.VCC U5.3 | length 446.5
  Top Layer w1: R5.2 24.257,57.718 v2(25.15,56.825) ; R3.2 31.242,57.858 v2(32.325,56.775) ; 32.028,76.378 32.538,76.888 U1.4 ; R36.2 38.227,57.898 v2(39.325,56.8) ; R41.2 45.212,57.913 v2@46.275,56.85 ; R56.2 52.197,58.078 v2(53.325,56.95) ; U3.VCC@84.208,58.532 83.075,57.398 83.075,54.9 94.7,43.275 98.95,43.275 100.54,41.685 103.575,41.685 ; U3.VCC@84.91,58.532 84.91,56.739 87.312,54.337 87.54,54.337 87.675,54.202 C13.2 87.675,53.948 89.381,52.242 R65.1 ; v1(106.474,106.3) 103.975,108.799 103.975,112.186 106.302,114.513 106.302,114.64 106.437,114.775 R60.2@106.564,114.775
  Top Layer w1.5: C10.1 96.999,103.65 103.649,103.65 U5.3 v1(106.474,106.3)
  Top Layer w2: 16.125,62.7 16.125,11.4 22.7,4.825 81.935,4.825 103,25.89 103,41.685 ; R1.2 28.139,67.564 30.226,69.651 C3.1 30.226,74.576 32.028,76.378 L1.2 ; 103.575,41.685 106.715,44.825 C34.1 113.665,44.825 D5.2
  Bottom Layer w2: v2(16.55,63.325) 24.726,71.501 C3.1 ; v2@53.34,56.825 v2(25.15,56.825) 30.226,61.901 C3.1 ; C10.1 91.65,98.301 91.65,95.78 92.325,95.105 92.325,86.775 84.85,79.3 32.975,79.3 30.226,76.551 C3.1
  other v2: 46.325,56.65
W_DC24V: 
W_GND: 
WAIT: J7.WAT JP7.17@130.775,56.72 | length 49.6
  Bottom Layer w0.254: J7.WAT 119.05,20.7 119.95,21.6 119.95,24.625 121.275,25.95 125.6,25.95 136.3,36.65 136.3,53.45 133.03,56.72 JP7.17@130.775,56.72
WR: J7.WR JP7.14@130.775,64.34 | length 53.1
  Bottom Layer w0.254: J7.WR 129.15,20.7 130.175,21.725 130.175,25.35 140.025,35.2 140.025,56.625 132.31,64.34 JP7.14@130.775,64.34
X_ASTB: 
X_BSTB: 
X_CLK: 
X_CSTB: 
X_DIO: 
X_DSTB: 
X_ESTB: 
X_FSTB: 
X_GSTB: 
X_SW_1: 
X_SW_2: 
X_SW_3: 
X_SW_4: 
pads on no net: "U3.QH\"" J3.3 J4.2 J7.NC J7.T_IN JP7.2@153.885,94.82 JP7.3 JP7.14@153.885,64.34 JP7.19@153.885,51.64 JP7.20@153.885,49.1 P3.1 P15.1 U1. U2.1 U2.3 U2.5 U2.6 U2.7 U2.8 U2.11 U2.12 U2.18 U3.D3 U5.4

## Polygon pours and split planes (outlines as drawn)
GND on Bottom Layer "NONET_L-01_P-001" (solid, pour order 1): 141.1,124.925 134.525,118.35 134.525,110.15 134.65,110.025 133.625,109 122.05,109 122.05,97.075 114.975,90 114.975,34.95 106.575,26.55 106.625,26.5 106.625,17.55 160.525,17.55 161.125,18.15 161,18.275 161,37.35 164.3,40.65 164.2,40.75 164.2,124.8
GND on Top Layer "NONET_L-01_P-001" (solid, pour order 0): 141.15,124.925 134.7,118.475 134.7,110.075 133.6,108.975 122.05,108.975 122.05,97.05 115.1,90.1 115.1,35.15 106.715,26.765 106.715,16.735 106.715,17.95 108.55,17.95 160.975,17.95 160.975,37.1 164.15,40.85 164.15,41.475 164.15,124.85

## Keep-outs
Keep-Out Layer:
  circle w0.254: c10,10 r2.5
  circle w0.254: c10,118 r2.5
  circle w0.254: c125,10 r2.5
  circle w0.254: c125,118 r2.5
  lines w0.254: 0,0 166.225,0 166.225,128 0,128 0,0

## Silkscreen, mask and mechanical layers (free items; w line width, h text height)
Top Overlay:
  circle w0.254: c10,10 r4.5
  circle w0.254: c10,118 r4.5
  circle w0.254: c125,10 r4.5
  circle w0.254: c125,118 r4.5
  text "电压更变" at 103.2,117.45 h2
  text "按钮" at 103.599,84.311 h2
  text "旋钮" at 107.624,53.039 h2
  text "-" at 74.004,46.204 h1
  text "+" at 74.004,43.712 h1
  text "显示板" at 134.55,10.74 h5
  text "ver2.1.0轩23/2/27" at 149.9,3.19 h2

## Text inside footprints (layer, text, board x,y; h text height)
J7: Top Overlay "2" at 107.29,21.081 h1 r180; Top Overlay "1" at 107.417,24.002 h1 r180; Top Overlay "33" at 160.122,23.621 h1 r180; Top Overlay "34" at 159.741,20.954 h1 r180
JP7: Top Overlay "5V" at 127.479,46.054 h0.9; Top Overlay "GND" at 126.594,43.529 h0.9; Top Overlay "GND" at 156.014,46.144 h0.9; Top Overlay "GND" at 155.909,43.494 h0.9; Top Overlay "IO21" at 156.014,53.994 h0.9; Top Overlay "BOOT" at 155.996,64.094 h0.9; Top Overlay "IO35" at 156.04,66.644 h0.9; Top Overlay "IO20" at 155.996,51.344 h0.9; Top Overlay "IO45" at 156.04,61.644 h0.9; Top Overlay "IO48" at 156.014,59.044 h0.9; Top Overlay "IO37" at 156.04,71.794 h0.9; Top Overlay "IO36" at 156.061,69.244 h0.9; Top Overlay "IO19" at 155.939,48.694 h0.9; Top Overlay "IO47" at 155.996,56.494 h0.9; Top Overlay "IO40" at 155.857,79.394 h0.9; Top Overlay "IO1" at 155.807,89.565 h0.9; Top Overlay "IO44" at 155.829,92.029 h0.9; Top Overlay "IO39" at 155.939,76.744 h0.9; Top Overlay "IO2" at 155.786,87.033 h0.9; Top Overlay "IO42" at 155.742,84.426 h0.9; Top Overlay "GND" at 156.382,97.189 h0.9; Top Overlay "IO43" at 155.939,94.594 h0.9; Top Overlay "IO38" at 155.939,74.144 h0.9; Top Overlay "IO41" at 155.807,81.844 h0.9; Top Overlay "IO12" at 126.054,53.754 h0.9; Top Overlay "IO46" at 125.954,63.879 h0.9; Top Overlay "IO3" at 126.704,66.59 h0.9; Top Overlay "IO13" at 126.079,51.329 h0.9; Top Overlay "IO9" at 126.679,61.404 h0.9; Top Overlay "IO10" at 126.054,58.904 h0.9; Top Overlay "IO18" at 125.929,71.566 h0.9; Top Overlay "IO8" at 126.829,68.929 h0.9; Top Overlay "IO14" at 126.004,48.604 h0.9; Top Overlay "IO11" at 126.229,56.454 h0.9; Top Overlay "IO15" at 125.904,79.164 h0.9; Top Overlay "IO4" at 126.929,89.479 h0.9; Top Overlay "RST" at 126.704,91.929 h0.9; Top Overlay "IO16" at 125.929,76.604 h0.9; Top Overlay "IO5" at 126.804,86.854 h0.9; Top Overlay "IO6" at 126.829,84.266 h0.9; Top Overlay "3V3" at 126.629,96.929 h0.9; Top Overlay "3V3" at 126.629,94.329 h0.9; Top Overlay "IO17" at 125.894,74.054 h0.9; Top Overlay "IO7" at 126.704,81.604 h0.9